# Altium PCB receiver_PCB.PcbDoc
Units mil, origin at the board's own origin, x right, y up, seen from the top; angles counter-clockwise.
Board outline 6000 x 4000 mil, 2 copper layers (Top Layer, Bottom Layer); 10 components, 9 nets, 26 pads, 0 vias.
Unrouted connection lines stored in the file: 1.
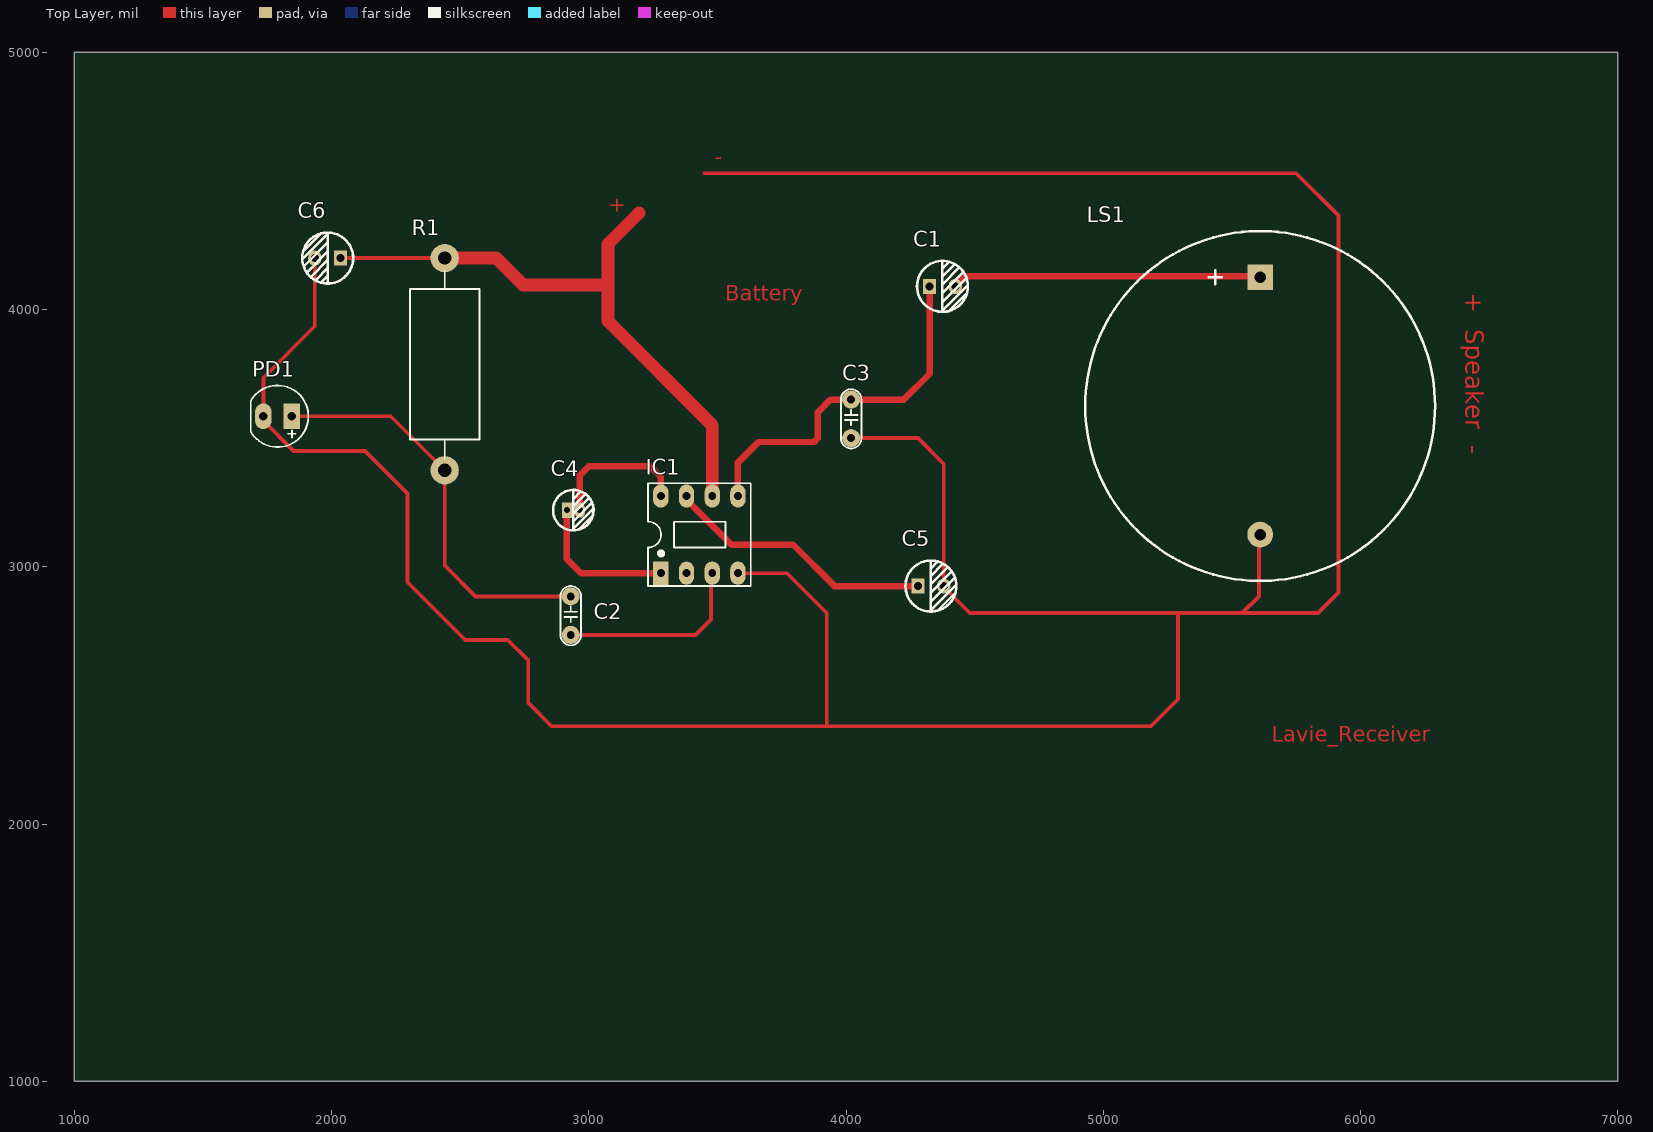
[diagram p0: Top Layer view]
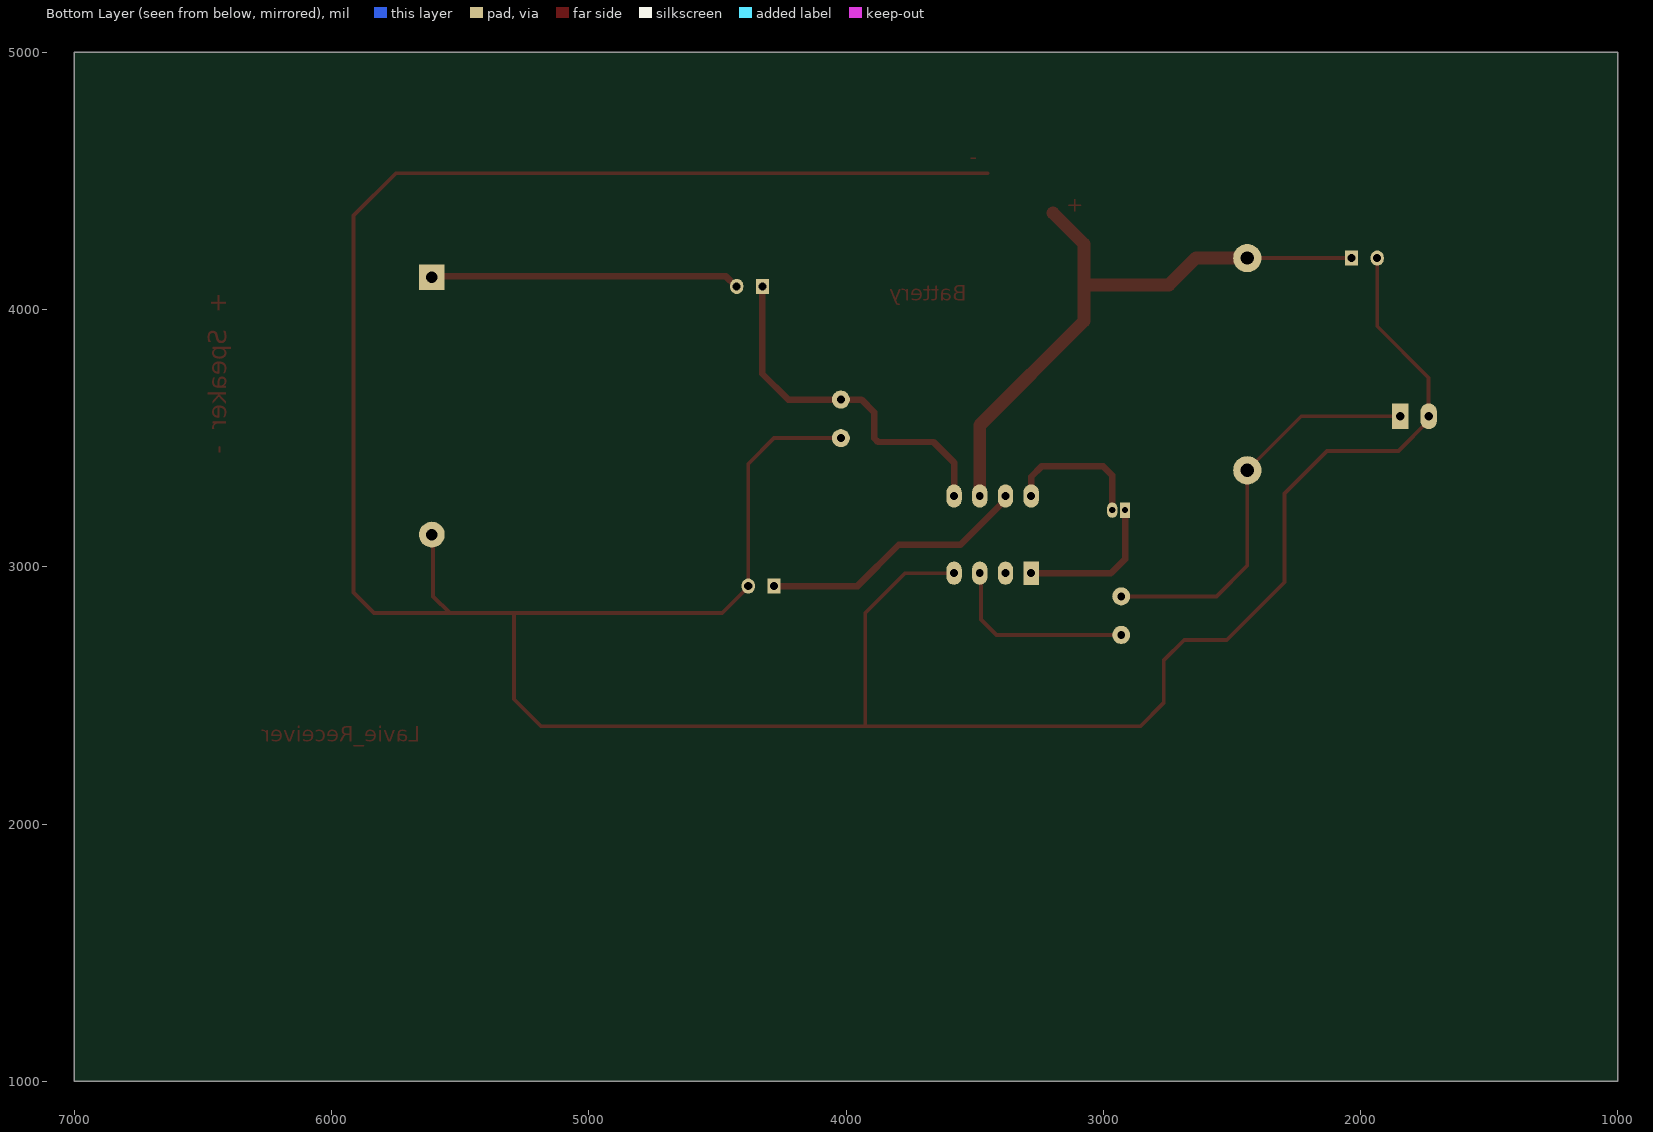
[diagram p1: Bottom Layer view, seen from below]
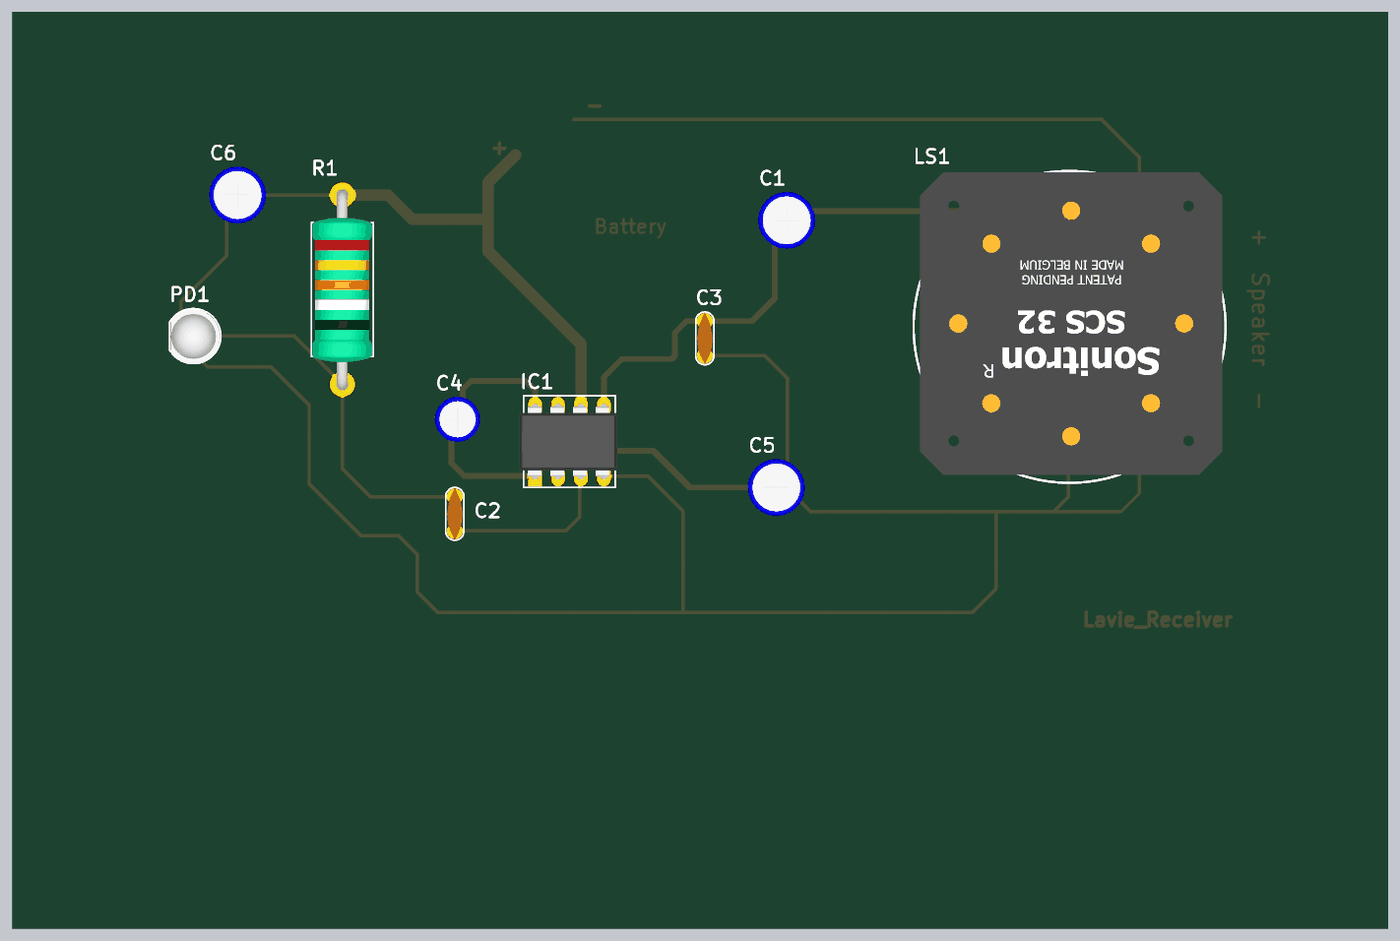
[diagram p2: 3D render of the assembled board from above, using the file's embedded part models]

## Layer stack, top to bottom
Top Solder: solder mask 0.4, Solder Resist, Dk 3.5
Top Layer: signal copper 1.4
Dielectric 1: dielectric 12.6, FR-4, Dk 4.8
Bottom Layer: signal copper 1.4
Bottom Solder: solder mask 0.4, Solder Resist, Dk 3.5

## Board outline
1000,1000 7000,1000 7000,5000 1000,5000

## Design rules (kind name [scope] priority, off if disabled: settings)
Clearance [All] p1: gap=10 ignorepadtopadclearanceinfootprint=FALSE except(0: Arc-Hole Track-Hole SMDPad-Hole THPad-Hole Via-Hole Fill-Hole Poly-Hole Region-Hole Text-Hole)
PolygonConnect [All] p1: connectstyle=Relief reliefconductorwidth=10 reliefentries=4 polygonreliefangle="90 Angle" airgapwidth=10
RoomDefinition receiver_SCH [InComponentClass('receiver_SCH')] p1: confinementstyle=ConfineIn formatcopy=TRUE lockcomponents=FALSE outline 1535,2200 6555,2200 6555,4690 1535,4690
RoutingVias [All] p1: holewidth=20 width=30 viastyle="Through Hole" minholewidth=15 minwidth=30 maxholewidth=20 maxwidth=30
SolderMaskExpansion [All] p1: expansion=4 istentingtop=FALSE
Width [All] p1: maxlimit=50 minlimit=15 preferedwidth=25 minimp=50.000000 maximp=50.000000 favimp=50.000000
30 further rules are at their usual default settings.

## Classes and differential pairs
component class receiver_SCH: C1 C2 C3 C4 C5 C6 IC1 LS1 PD1

## Components (designator, comment, footprint, x,y, rotation, side; value= is the part's Value field where it differs from the comment)
C1 "100uF" "tu hoa 5mm" 4375,4090 r0 top
C2 "Cap Non-Pol" CN1.5 2930,2885 r270 top value=220nF
C3 "Cap Non-Pol" CN1.5 4020,3650 r270 top value=100nF
C4 "10uF" "tu hoa 4mm" 2940,3220 r0 top
C5 "100uF" "tu hoa 5mm" 4330,2925 r0 top
C6 "100uF" "tu hoa 5mm" 1985,4200 r180 top
IC1 "LM386" DIP8 3425,3125 r0 top value=LM358
LS1 "Speaker" SP1 5610,4125 r180 top
PD1 "PHOTO TRAN" LED-5TRED 1790,3585 r180 top
R1 "620k" RES-2W 2435,3795 r270 top

## Footprints (in the part's own frame and the unit in brackets; to place one, negate y for a bottom-side part, rotate by r counter-clockwise, add the part's x,y. Pads: shape width x height; smd on the part's side, far side on the other; paste and mask are expansions set on the pad)
CN1.5 [mil]
  round 70 hole 31: 1(0,0) 2(150,0)
  silkscreen extent -40,-40 190,40, body extent -40,-33 190,33, height 235
DIP8 [mil] "DIP, 8-Leads, Row Spacing 7.62mm, Pitch 2.54mm, Body 9.91x6.73mm"
  rect 60x90 hole 31: 1(-145,-150)
  oval 60x90 hole 31: 2(-45,-150) 3(55,-150) 4(155,-150) 5(155,150) 6(55,150) 7(-45,150) 8(-145,150)
  silkscreen extent -195,-200 205,200, body extent -213,-153 213,153, height 177
LED-5TRED [mil] "LED 2 PIN, 5 ly , Only colour, pin to pin 110mil"
  rect 65x100 hole 32: 1(-55,0)
  oval 65x100 hole 32: 2(55,0)
  silkscreen extent -120,-120 104,120, body extent -116,-117 98,120, height 339
RES-2W [mil] "R2W, 2 pin, 700mil"
  round 110 hole 51.18: 1(-405,5) 2(420,5)
  silkscreen extent -355,-130 375,140, body extent -428,-126 446,134, height 277
SP1 [mil] "Speaker Telphone on Broad"
  rect 100x100 hole 45: 1(0,0)
  round 100 hole 45: 2(0,1000)
  silkscreen extent -680,-180 680,1180, body extent -667,-175 652,1144, height 383
"tu hoa 4mm" [mm]
  rect 1x1.5 hole 0.6: 1(-0.635,0)
  oval 1x1.5 hole 0.6: 2(0.635,0)
  silkscreen extent -2,-2 2.01,2.01, body extent -2.47,-2.47 2.58,2.58, height 14.81
"tu hoa 5mm" [mm]
  rect 1.3x1.5 hole 0.8: 1(-1.27,0)
  oval 1.3x1.5 hole 0.8: 2(1.27,0)
  silkscreen extent -2.51,-2.51 2.51,2.51, body extent -3.12,-3.18 3.23,3.18, height 14.55

## Part data
C1 C5 C6: library part "Tu Hoa 100uF 25V 6x11", "Cắm", Chung_Loai=Cắm, Don_Vi=Con, Ma_Hang=MH001351, So_Chan=2, Ten_Linh_Kien="Tụ Hóa 100uF 25V 6x11MM"
C2 C3: "Capacitor"
C4: library part "Tu Hoa 10uF 25V 4x7", "Cắm", Chung_Loai=Cắm, Don_Vi=Con, Ma_Hang=MH001349, So_Chan=2, Ten_Linh_Kien="Tụ Hóa 10uF 25V 4x7MM"
IC1: "Low-Power Dual Operational Amplifier"
LS1: "Loudspeaker", LatestRevisionDate=17-Jul-2002, LatestRevisionNote="Re-released for DXP Platform.", PackageReference=PIN2, Published=24-Mar-1999, Publisher="Altium Limited"
PD1: library part "Photo TRAN", "Photo TRAN", Code_JEDEC=TO-220-AC, LatestRevisionDate=17-Jul-2002, LatestRevisionNote="Re-released for DXP Platform.", PackageReference=TO-220_A, Published=24-Mar-1999, Publisher="Altium Limited"
R1: library part Res, "Res", Manufacturer="Generic Components", Class=Passive, Published=08/06/2000, Publisher="Altium Hobart Technology Centre", SubClass=R

## Nets (pads, with @x,y where several pads share a name; then routed paths per layer and width w, separated by ;. In a path a pad name is that pad's centre, name@x,y a point inside that pad or via, vN(x,y) a via of type N, cw(c..) or ccw(c..) an arc to the next point about the centre after c; other vN are vias at no path point)
GND: C3.2 C5.2 C6.2 IC1.2 IC1.4 LS1.2 PD1.2 | length 13059.3
  Top Layer w15: C6.2 1935,3935 1735,3735 PD1.2 1735,3567.5 1852.5,3450 2130,3450 2295,3285 2295,2940 2520,2715 2685,2715 2765,2635 2765,2470 2855,2380 3925,2380 ; 3450,4530 5750,4530 5915,4365 5915,2900 5835,2820 5540,2820 ; IC1.4 3770,2975 3925,2820 3925,2380 ; C3.2 4280,3500 4380,3400 C5.2 4380,2921.06 4481.06,2820 5290,2820 ; 5605,3075 5605,2885 5540,2820 ; 3925,2380 5185,2380 5290,2485 5290,2820 ; 5290,2820 5540,2820
NetC1_1: C1.1 C3.1 IC1.5 | length 1416.7
  Top Layer w25: IC1.5 3580,3405 3660,3485 3875.36,3485 3890,3499.64 3890,3600 3940,3650 C3.1 4225,3650 4325,3750 C1.1
NetC1_2: C1.2 LS1.1 | length 1203.6
  Top Layer w25: C1.2 4428.15,4090 4468.15,4130 5605,4130 LS1.1
NetC2_1: C2.1 PD1.1 R1.2 | length 1591.7
  Top Layer w15: PD1.1 2230,3585 R1.2 2440,3005 2560,2885 C2.1
NetC2_2: C2.2 IC1.3 | length 751.9
  Top Layer w15: C2.2 3415,2735 3475,2795 3475,2970 IC1.3
NetC4_1: C4.1 IC1.1 | length 577.8
  Top Layer w25: C4.1 2915,3030 2970,2975 IC1.1
NetC4_2: C4.2 IC1.8 | length 556.1
  Top Layer w25: C4.2 2965,3355 3000,3390 3240,3390 3280,3350 IC1.8
NetC5_1: C5.1 IC1.7 | length 1053.8
  Top Layer w25: IC1.7 3380,3260 3555,3085 3795,3085 3955,2925 C5.1
VCC: C6.1 IC1.6 R1.1 | length 2407.2
  Top Layer w15: C6.1 R1.1
  Top Layer w50: R1.1 2640,4200 2745,4095 3060,4095 3075,4080 ; 3195,4375 3075,4255 3075,4080 ; IC1.6 3480,3550 3075,3955 3075,4080
copper on no net: | length 32.1
  Top Layer w10: 5610,3115 5615,3110 ; 5610,3125 5610,3140
  Top Layer w15: 5610,3115 5610,3125

## Other copper
Top Layer:
  text "-" at 3490,4565.01 h60
  text "+" at 3075,4380 h60
  text "+  Speaker  -" at 6408.33,4065 h70 r270
  text "Battery" at 3530,4034.99 h60
  text "Lavie_Receiver" at 5655,2320 h60